# EAGLE board CT_schematic (EAGLE 7.6.0)

Size 100 x 80 mm. Coordinates in mm from the lower left corner, seen from the top.
Outline: 0,0 100,0 100,80 0,80 0,0
Copper layers (1*16): Top 0.035mm / dielectric 1.5mm / Bottom 0.035mm
Design rules "default": minimum track width 10mil, minimum drill 24mil, track to track 8mil, track to pad 8mil, pad to pad 8mil, via to via 8mil, smd to smd 8mil, copper to edge 40mil, drill to drill 8mil, minimum pad ring 10mil, minimum via ring 8mil, stop-mask expansion 4mil, vias tented up to drill 0mil, thermal gap 10mil

## Footprints (pad centres in the part's own frame; a part is rotated, then mirrored left to right if it is on the bottom)
C0603 = smd 0.8 x 0.8: 1 -0.762,0; 2 0.762,0
C0402 = smd 0.5 x 0.5: 1 -0.508,0; 2 0.508,0
C0805 = smd 1.2 x 1.3: 1 -1.016,0; 2 1.016,0
C1210 = smd 1.2 x 2.5: 1 -1.524,0; 2 1.524,0
EXV-9H = smd 3.505 x 1.676: 1 -2.857,0; 2 2.857,0
L0603 = smd 0.8 x 0.8: 1 -0.762,0; 2 0.762,0
L1210 = smd 1.2 x 2.5: 1 -1.524,0; 2 1.524,0
PJ-037B_PACKAGE = drill 3.7 square: 1 12,0 | drill 3.2 square: 2 6,0
R0603 = smd 0.8 x 0.8: 1 -0.762,0; 2 0.762,0
LQFP48 = smd 0.3 x 1.2: 1 -2.75,-4.25; 2 -2.25,-4.25; 3 -1.75,-4.25; 4 -1.25,-4.25; 5 -0.75,-4.25; 6 -0.25,-4.25; 7 0.25,-4.25; 8 0.75,-4.25; 9 1.25,-4.25; 10 1.75,-4.25; 11 2.25,-4.25; 12 2.75,-4.25; 25 2.75,4.25; 26 2.25,4.25; 27 1.75,4.25; 28 1.25,4.25; 29 0.75,4.25; 30 0.25,4.25; 31 -0.25,4.25; 32 -0.75,4.25; 33 -1.25,4.25; 34 -1.75,4.25; 35 -2.25,4.25; 36 -2.75,4.25 | smd 1.2 x 0.3: 13 4.25,-2.75; 14 4.25,-2.25; 15 4.25,-1.75; 16 4.25,-1.25; 17 4.25,-0.75; 18 4.25,-0.25; 19 4.25,0.25; 20 4.25,0.75; 21 4.25,1.25; 22 4.25,1.75; 23 4.25,2.25; 24 4.25,2.75; 37 -4.25,2.75; 38 -4.25,2.25; 39 -4.25,1.75; 40 -4.25,1.25; 41 -4.25,0.75; 42 -4.25,0.25; 43 -4.25,-0.25; 44 -4.25,-0.75; 45 -4.25,-1.25; 46 -4.25,-1.75; 47 -4.25,-2.25; 48 -4.25,-2.75
A2500R24A00GM = smd 1.5 x 0.61: 1 -3,7; 2 -3,6; 3 -3,5; 4 -3,4; 5 -3,3; 6 -3,2; 7 -3,1; 8 -3,0; 17 5.22,0; 18 5.22,1; 19 5.22,2; 20 5.22,3; 21 5.22,4; 22 5.22,5; 23 5.22,6; 24 5.22,7 | smd 0.61 x 1.5: 9 -2.39,-1.6; 10 -1.39,-1.6; 11 -0.39,-1.6; 12 0.61,-1.6; 13 1.61,-1.6; 14 2.61,-1.6; 15 3.61,-1.6; 16 4.61,-1.6 | smd 1 x 1: 25 -2.8,9; 26 -2.8,13; 27 5.02,9; 28 5.02,13; 29 0.11,5.75; 30 2.11,5.75
SSOP-20 = smd 1.651 x 0.432: 1 -3.48,2.925; 2 -3.48,2.275; 3 -3.48,1.625; 4 -3.48,0.975; 5 -3.48,0.325; 6 -3.48,-0.325; 7 -3.48,-0.975; 8 -3.48,-1.625; 9 -3.48,-2.275; 10 -3.48,-2.925; 11 3.48,-2.925; 12 3.48,-2.275; 13 3.48,-1.625; 14 3.48,-0.975; 15 3.48,-0.325; 16 3.48,0.325; 17 3.48,0.975; 18 3.48,1.625; 19 3.48,2.275; 20 3.48,2.925
182-009-MALE = drill 1.194 pad 1.524 octagon: 1 -5.537,10.923; 2 -2.769,10.923; 3 0,10.923; 4 2.769,10.923; 5 5.537,10.923; 6 -4.153,8.08; 7 -1.384,8.08; 8 1.384,8.08; 9 4.153,8.08 | hole 3.048: -12.446,9.501; 12.446,9.501
ABLS-25.000MHZ-B2F-T = smd 5.6 x 2.8: 1 -3.81,0; 2 5.69,0
ASEK = smd 1.4 x 1: 1 -1.1,-0.8; 2 1.1,-0.8; 3 1.1,0.8; 4 -1.1,0.8
WSON-8 = smd 0.3 x 0.6: 1 -0.75,0; 2 0.05,0; 3 0.85,0; 4 1.65,0; 5 1.65,3.8; 6 0.85,3.8; 7 0.05,3.8; 8 -0.75,3.8 | smd 3 x 2.6: PAD 0.45,1.9
SON-6 = smd 0.55 x 0.3: 1 -0.355,0.5 | smd 0.52 x 0.3: 2 -0.37,0; 3 -0.37,-0.5; 4 0.37,-0.5; 5 0.37,0; 6 0.37,0.5
SW_4-1437565-2 = smd 1.4 x 2.1: 1 -2.23,4.55; 2 -2.23,-4.55; 3 2.23,4.55; 4 2.23,-4.55
LGM67K-G1J2-24-Z = smd 0.8 x 1.4: A -2,0; C 0,0
NC7SZ125M5X = smd 1.3 x 0.7: 1 -1.3,0.95; 2 -1.3,0; 3 -1.3,-0.95; 4 1.3,-0.95; 5 1.3,0.95

## Placement (x,y rotation side)
C1  1e-06  [C0603]  -33.02,66.04 0 top  (outside the outline)
C2  1e-07  [C0603]  -36.83,66.04 0 top  (outside the outline)
C3  1e-07  [C0603]  -40.64,66.04 0 top  (outside the outline)
C4  1e-07  [C0603]  -44.45,66.04 0 top  (outside the outline)
C5  4.7e-06  [C0603]  -29.21,66.04 0 top  (outside the outline)
C6  1e-08  [C0603]  -48.26,66.04 0 top  (outside the outline)
C7  1e-06  [C0603]  -52.07,66.04 0 top  (outside the outline)
C8  1e-11  [C0402]  -34.29,71.12 0 top  (outside the outline)
C9  1e-11  [C0402]  -38.1,71.12 0 top  (outside the outline)
C10  1e-05  [C0805]  -27.94,59.69 0 top  (outside the outline)
C11  1e-06  [C0603]  -55.88,66.04 0 top  (outside the outline)
C12  1e-06  [C0603]  -59.69,66.04 0 top  (outside the outline)
C13  1e-06  [C0603]  -63.5,66.04 0 top  (outside the outline)
C14  4.7e-06  [C0805]  -33.02,59.69 0 top  (outside the outline)
C15  1e-08  [C0402]  -41.91,71.12 0 top  (outside the outline)
C16  1e-08  [C0402]  -45.72,71.12 0 top  (outside the outline)
C17  1e-05  [C1210]  -59.69,53.34 0 top  (outside the outline)
C18  1e-05  [C1210]  -66.04,53.34 0 top  (outside the outline)
C19  1e-07  [C0402]  -49.53,71.12 0 top  (outside the outline)
C20  0.0001  [EXV-9H]  -58.42,44.45 0 top  (outside the outline)
C21  0.0001  [EXV-9H]  -17.78,53.34 0 top  (outside the outline)
C22  1e-08  [C0402]  -53.34,71.12 0 top  (outside the outline)
F1  240.0  [L0603]  -67.31,66.04 0 top  (outside the outline)
I1  1.5e-05  [L1210]  -16.51,60.96 0 top  (outside the outline)
J1  PJ-037B  [PJ-037B_PACKAGE]  -27.94,33.02 0 top  (outside the outline)
R1  10000.0  [R0603]  -68.58,59.69 0 top  (outside the outline)
R2  1000.0  [R0603]  -71.12,66.04 0 top  (outside the outline)
R3  1600.5  [R0603]  -15.24,71.12 0 top  (outside the outline)
R4  4700.0  [R0603]  -19.05,71.12 0 top  (outside the outline)
R5  10000.0  [R0603]  -15.24,66.04 0 top  (outside the outline)
R6  100000.0  [R0603]  -38.1,59.69 0 top  (outside the outline)
R7  100000.0  [R0603]  -43.18,59.69 0 top  (outside the outline)
R8  100000.0  [R0603]  -48.26,59.69 0 top  (outside the outline)
R9  100000.0  [R0603]  -53.34,59.69 0 top  (outside the outline)
R10  2231.0  [R0603]  -22.86,71.12 0 top  (outside the outline)
R11  1000.0  [R0603]  -26.67,71.12 0 top  (outside the outline)
R12  10000.0  [R0603]  -20.32,66.04 0 top  (outside the outline)
R13  10000.0  [R0603]  -25.4,66.04 0 top  (outside the outline)
R14  9100.0  [R0603]  -30.48,71.12 0 top  (outside the outline)
R15  680000.0  [R0603]  -58.42,59.69 0 top  (outside the outline)
R16  120000.0  [R0603]  -63.5,59.69 0 top  (outside the outline)
U1  stm32f031c6t6  [LQFP48]  -58.42,30.48 0 top  (outside the outline)
U2  A2500R24A00GM  [A2500R24A00GM]  -27.94,7.62 0 top  (outside the outline)
U3  MAX3218EAP+T  [SSOP-20]  -68.58,29.21 0 top  (outside the outline)
U4  182-009-113R531  [182-009-MALE]  -57.15,6.35 0 top  (outside the outline)
U5  ABLS-25.000MHZ-B2F-T  [ABLS-25.000MHZ-B2F-T]  -36.83,53.34 0 top  (outside the outline)
U6  ASEK-32.768KHz-ECST  [ASEK]  -49.53,44.45 0 top  (outside the outline)
U7  LP3878SDX-ADJ/NOPB  [WSON-8]  -30.48,43.18 0 top  (outside the outline)
U8  TPS3895ADRYR  [SON-6]  -55.88,69.85 0 top  (outside the outline)
U9  4-1437565-2  [SW_4-1437565-2]  -44.45,31.75 0 top  (outside the outline)
U10  Q65110A2395  [LGM67K-G1J2-24-Z]  -48.26,53.34 0 top  (outside the outline)
U11  nc7sz125m5x  [NC7SZ125M5X]  -21.59,59.69 0 top  (outside the outline)

## Library data of the parts
C1-C22 F1 I1 J1 R1-R16 U1-U11 = circuit_tree

## Nets
CLK_CRYSTAL_U1_5: C8.1 U1.5 U5.1
CLK_CRYSTAL_U1_6: C9.1 U1.6 U5.2
CLK_U1_3: U1.3 U6.3
GND: C1.2 C2.2 C3.2 C4.2 C5.2 C6.2 C7.2 C8.2 C9.2 C10.2 C11.2 C12.2 C13.2 C15.2 C16.2 C17.2 C18.2 C19.2 C20.2 C21.2 C22.2 J1.2 R2.2 R5.2 R11.2 R14.2 R16.2 U1.8 U1.23 U1.47 U2.8 U2.17 U3.5 U3.17 U3.20 U4.5 U6.2 U7.3 U7.PAD U8.2 U10.C U11.1 U11.3
NET_U1_7: R4.1 U1.7 U11.4
NET_U1_9: C6.1 C7.1 F1.1 U1.9
NET_U1_44: R5.1 U1.44
NET_U1_45: R3.1 U1.45 U10.A
NET_U1_46: R1.1 U1.46 U9.3 U9.4
NET_U3_1: I1.1 U3.1
NET_U3_2: R6.1 U3.2
NET_U3_3: R7.1 U3.3
NET_U3_4: R8.1 U3.4
NET_U3_15: C13.1 U3.15
NET_U3_16: C14.2 U3.16
NET_U3_18: C14.1 U3.18
NET_U3_19: C12.1 U3.19
NET_U4_2: U3.12 U4.2
NET_U4_3: U3.14 U4.3
NET_U4_7: U3.11 U4.7
NET_U4_8: U3.13 U4.8
NET_U7_1: C16.1 U7.1
NET_U7_6: R10.2 R11.1 U7.6
NET_U7_8: R9.1 U7.8
NET_U8_1: R13.1 R14.1 U8.1
NET_U8_3: R15.2 R16.1 U8.3
NET_U8_4: R12.1 U8.4 U11.2
NET_U9_1: R2.1 U9.1 U9.2
PROC_SPI1_MISO: U1.16 U2.10
PROC_SPI1_MOSI: U1.17 U2.11
PROC_SPI1_NSS: U1.14 U2.12
PROC_SPI1_SCK: U1.15 U2.9
PROC_USART1_CTS: U1.10 U3.8
PROC_USART1_RTS: U1.11 U3.10
PROC_USART1_RX: U1.13 U3.9
PROC_USART1_TX: U1.12 U3.7
VCC_S1_13V5: C17.1 C20.1 C21.1 J1.1 R9.2 U7.4
VCC_TIER1_3V3: C1.1 C2.1 C3.1 C4.1 C5.1 C10.1 C11.1 C15.1 C18.1 C19.1 C22.1 F1.2 I1.2 R1.2 R3.2 R4.2 R6.2 R7.2 R8.2 R10.1 R12.2 R13.2 R15.1 U1.1 U1.24 U1.48 U2.18 U3.6 U6.4 U7.5 U8.6 U11.5

## Tracks (layer width: path | path; a pad name or v marks a point on that pad's centre or on a via)
CLK_CRYSTAL_U1_5  (2 unrouted)
CLK_CRYSTAL_U1_6  (2 unrouted)
CLK_U1_3  (1 unrouted)
GND  (42 unrouted)
NET_U1_7  (2 unrouted)
NET_U1_9  (3 unrouted)
NET_U1_44  (1 unrouted)
NET_U1_45  (2 unrouted)
NET_U1_46  (3 unrouted)
NET_U3_1  (1 unrouted)
NET_U3_2  (1 unrouted)
NET_U3_3  (1 unrouted)
NET_U3_4  (1 unrouted)
NET_U3_15  (1 unrouted)
NET_U3_16  (1 unrouted)
NET_U3_18  (1 unrouted)
NET_U3_19  (1 unrouted)
NET_U4_2  (1 unrouted)
NET_U4_3  (1 unrouted)
NET_U4_7  (1 unrouted)
NET_U4_8  (1 unrouted)
NET_U7_1  (1 unrouted)
NET_U7_6  (2 unrouted)
NET_U7_8  (1 unrouted)
NET_U8_1  (2 unrouted)
NET_U8_3  (2 unrouted)
NET_U8_4  (2 unrouted)
NET_U9_1  (2 unrouted)
PROC_SPI1_MISO  (1 unrouted)
PROC_SPI1_MOSI  (1 unrouted)
PROC_SPI1_NSS  (1 unrouted)
PROC_SPI1_SCK  (1 unrouted)
PROC_USART1_CTS  (1 unrouted)
PROC_USART1_RTS  (1 unrouted)
PROC_USART1_RX  (1 unrouted)
PROC_USART1_TX  (1 unrouted)
VCC_S1_13V5  (5 unrouted)
VCC_TIER1_3V3  (31 unrouted)